# Altium PCB S52多功能板.PcbDoc (part 5 of 5)
Units mm, origin at the board's own origin, x right, y up, seen from the top; angles counter-clockwise.
Board outline 152.4 x 101.6 mm, 2 copper layers (Top Layer, Bottom Layer); 136 components, 143 nets, 561 pads, 46 vias.
Unrouted connection lines stored in the file: 1.
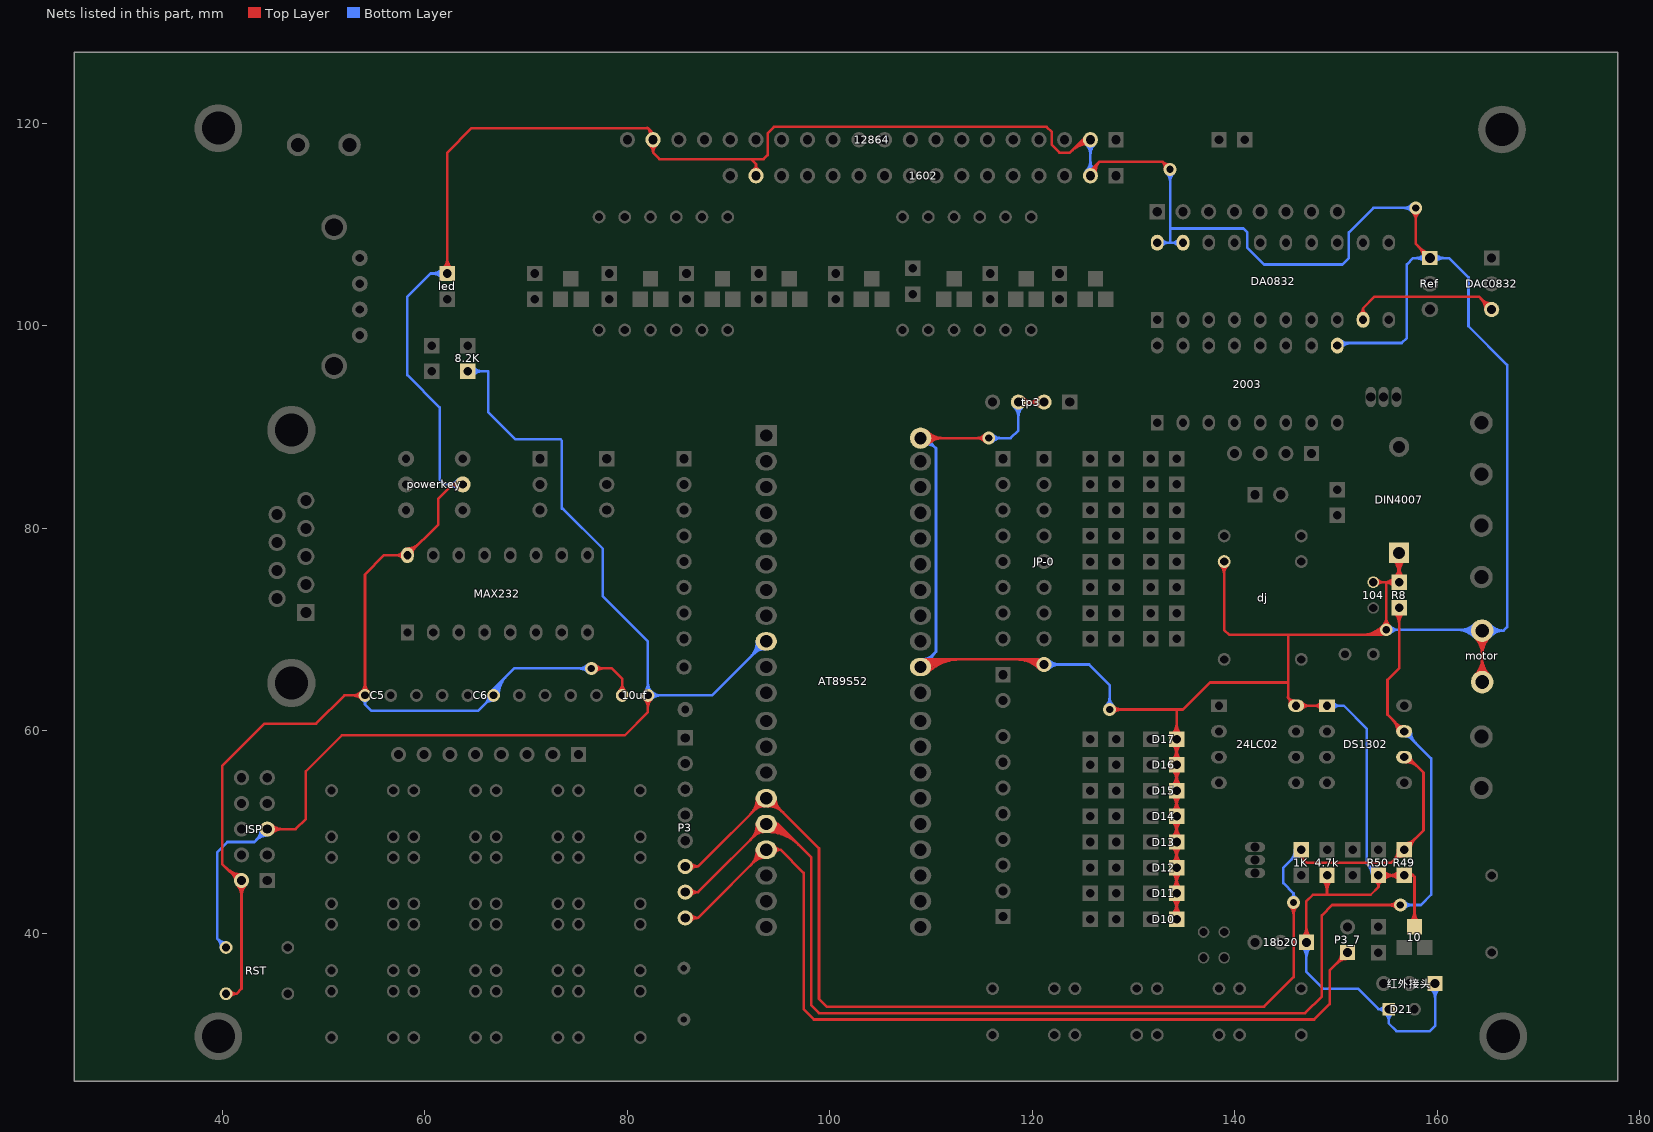
[diagram p5: the nets of this part, all layers, seen from the top]

## Via types
v1: diameter 1.27, hole 0.711, Top Layer to Bottom Layer, 46 vias

## Nets (pads, with @x,y where several pads share a name; then routed paths per layer and width w, separated by ;. In a path a pad name is that pad's centre, name@x,y a point inside that pad or via, vN(x,y) a via of type N, cw(c..) or ccw(c..) an arc to the next point about the centre after c; other vN are vias at no path point) (continued)
P35: 1K.1 AT89S52.15 DS1302.6 P3.6 R49.1 | length 148.3
  Top Layer w0.254: P3.6@85.725,46.609 86.995,46.609 ; P3.6@86.017,46.383 cw(c86.477,46.027) 86.477,46.609 cw(c86.477,47.191) P3.6@86.017,46.835 ; P3.6@86.218,46.228 cw(c86.995,45.626) 86.995,46.609 ; P3.6@86.218,46.99 ccw(c86.995,47.592) 86.995,46.609 ; 92.146,51.76 ccw(c90.566,53.34) AT89S52.15@92.801,53.34 ; 92.508,52.122 cw(c93.576,51.055) AT89S52.15@93.576,52.565 ; 92.58,52.194 ccw(c91.434,53.34) AT89S52.15@93.055,53.34 ; 92.942,52.556 cw(c93.576,51.922) AT89S52.15@93.576,52.819 ; 93.013,52.627 ccw(c92.301,53.34) AT89S52.15@93.309,53.34 ; AT89S52.15@93.876,52.565 cw(c93.876,50.442) 95.377,51.943 ; AT89S52.15@93.876,52.819 cw(c93.876,51.309) 94.944,52.376 ; AT89S52.15@94.397,53.34 ccw(c95.405,53.34) 94.693,52.627 ; AT89S52.15@94.651,53.34 ccw(c96.272,53.34) 95.126,52.194 ; v1@145.437,42.694 cw(c144.57,41.827) 145.796,41.827 cw(c147.022,41.827) v1@146.155,42.694 ; v1(145.796,43.053) 145.796,35.687 142.875,32.766 99.695,32.766 98.933,33.528 98.933,48.387 93.98,53.34 AT89S52.15@93.726,53.34 86.995,46.609 ; 1K.1@146.558,48.26 146.558,47.498 147.066,46.99 155.448,46.99 158.623,50.165 158.623,55.88 157.1,57.403 DS1302.6@156.714,57.403 ; R49.1@156.083,48.26 cw(c154.55,48.26) 155.634,47.176 cw(c156.718,46.092) R49.1@156.718,47.625 ; R49.1@156.337,48.26 cw(c155.417,48.26) 156.068,47.61 cw(c156.718,46.959) R49.1@156.718,47.879 ; R49.1@156.718,48.641 ccw(c156.718,49.561) 157.368,48.91 ccw(c158.019,48.26) R49.1@157.099,48.26 ; R49.1@156.718,48.895 ccw(c156.718,50.428) 157.802,49.344 ccw(c158.886,48.26) R49.1@157.353,48.26 ; DS1302.6@156.892,56.92 cw(c156.892,55.253) 158.071,56.432 ; DS1302.6@156.892,57.174 cw(c156.892,56.12) 157.637,56.866 ; DS1302.6@157.375,57.403 ccw(c158.037,57.403) 157.569,56.934
  Bottom Layer w0.254: v1@145.538,43.491 ccw(c145.272,43.942) 145.796,43.942 ; v1(145.796,43.053) 145.796,43.942 ; 1K.1@145.923,48.26 cw(c144.39,48.26) 145.474,47.176 cw(c146.558,46.092) 1K.1@146.558,47.625 ; v1@146.054,43.491 cw(c146.32,43.942) 145.796,43.942 ; 1K.1@146.177,48.26 cw(c145.257,48.26) 145.908,47.61 cw(c146.558,46.959) 1K.1@146.558,47.879 ; 1K.1@146.558,48.26 144.78,46.482 144.78,44.958 145.796,43.942
P36: AT89S52.16 DS1302.7 P3.7 R8.1 | length 166.9
  Top Layer w0.254: P3.7@85.725,44.069 86.995,44.069 ; P3.7@86.017,43.843 cw(c86.477,43.487) 86.477,44.069 cw(c86.477,44.651) P3.7@86.017,44.295 ; P3.7@86.218,43.688 cw(c86.995,43.086) 86.995,44.069 ; P3.7@86.218,44.45 ccw(c86.995,45.052) 86.995,44.069 ; 92.146,49.22 ccw(c90.566,50.8) AT89S52.16@92.801,50.8 ; 92.508,49.582 cw(c93.576,48.515) AT89S52.16@93.576,50.025 ; 92.58,49.654 ccw(c91.434,50.8) AT89S52.16@93.055,50.8 ; 92.942,50.016 cw(c93.576,49.382) AT89S52.16@93.576,50.279 ; 93.013,50.087 ccw(c92.301,50.8) AT89S52.16@93.309,50.8 ; AT89S52.16@93.876,50.025 cw(c93.876,45.755) 96.895,48.774 ; AT89S52.16@93.876,50.279 cw(c93.876,46.623) 96.461,49.208 ; AT89S52.16@93.876,50.533 cw(c93.876,47.49) 96.028,49.641 ; AT89S52.16@93.876,50.787 cw(c93.876,48.357) 95.594,50.075 ; AT89S52.16@93.876,51.041 cw(c93.876,49.224) 95.16,50.509 ; AT89S52.16@94.628,50.612 cw(c94.869,50.552) 94.869,50.8 ; AT89S52.16@94.628,50.988 ccw(c94.869,51.048) 94.869,50.8 ; 155.587,61.07 cw(c154.459,59.943) DS1302.7@156.054,59.943 ; R8.1@155.761,71.687 cw(c154.677,70.603) 156.21,70.603 cw(c157.743,70.603) R8.1@156.659,71.687 ; R8.1@155.941,71.867 cw(c155.29,71.216) 156.21,71.216 cw(c157.13,71.216) R8.1@156.479,71.867 ; v1@155.978,42.44 ccw(c155.111,41.573) 155.111,42.799 ccw(c155.111,44.025) v1@155.978,43.158 ; 156.016,60.641 ccw(c156.536,61.161) DS1302.7@156.536,60.426 ; 156.02,60.637 cw(c155.327,59.943) DS1302.7@156.308,59.943 ; DS1302.7@156.206,59.94 DS1302.7@156.206,59.943 ; R8.1@156.21,72.136 156.21,66.167 155.067,65.024 155.067,61.59 DS1302.7@156.714,59.943 ; v1(156.337,42.799) 149.606,42.799 148.59,41.783 148.59,33.782 146.939,32.131 98.933,32.131 98.171,32.893 98.171,47.498 94.869,50.8 ; 86.995,44.069 AT89S52.16@93.726,50.8 94.869,50.8
  Bottom Layer w0.254: v1(156.337,42.799) 158.369,42.799 159.385,43.815 159.385,57.272 DS1302.7@156.714,59.943 ; v1@156.696,42.44 cw(c157.563,41.573) 157.563,42.799 cw(c157.563,44.025) v1@156.696,43.158 ; DS1302.7@156.892,59.46 cw(c156.892,58.725) 157.412,59.245 ; DS1302.7@157.121,59.943 ccw(c158.102,59.943) 157.408,59.249 ; DS1302.7@157.375,59.943 ccw(c158.969,59.943) 157.842,58.816
P37: AT89S52.17 P3.8 P3_7.1 | length 101.4
  Top Layer w0.254: P3.8@85.725,41.529 86.995,41.529 ; P3.8@86.017,41.303 cw(c86.477,40.947) 86.477,41.529 cw(c86.477,42.111) P3.8@86.017,41.755 ; P3.8@86.218,41.148 cw(c86.995,40.546) 86.995,41.529 ; P3.8@86.218,41.91 ccw(c86.995,42.512) 86.995,41.529 ; 92.146,46.68 ccw(c90.566,48.26) AT89S52.17@92.801,48.26 ; 92.508,47.042 cw(c93.576,45.975) AT89S52.17@93.576,47.485 ; 92.58,47.114 ccw(c91.434,48.26) AT89S52.17@93.055,48.26 ; 92.942,47.476 cw(c93.576,46.842) AT89S52.17@93.576,47.739 ; 93.013,47.547 ccw(c92.301,48.26) AT89S52.17@93.309,48.26 ; AT89S52.17@94.571,47.917 cw(c95.123,47.645) 95.123,48.26 ; AT89S52.17@94.571,48.603 ccw(c95.123,48.875) 95.123,48.26 ; P3_7.1@150.507,38.1 cw(c149.003,38.1) 150.066,37.036 cw(c151.13,35.973) P3_7.1@151.13,37.477 ; P3_7.1@150.761,38.1 cw(c149.87,38.1) 150.5,37.47 cw(c151.13,36.84) P3_7.1@151.13,37.731 ; P3_7.1@151.13,38.1 149.352,36.322 149.352,33.02 147.828,31.496 98.425,31.496 97.409,32.512 97.409,45.974 95.123,48.26 ; 86.995,41.529 AT89S52.17@93.726,48.26 95.123,48.26
RESET: 8.2K.1 10uf.2 AT89S52.9 ISP.5 RST.1 | length 144.2
  Top Layer w0.254: ISP.5@44.45,50.292 47.244,50.292 48.26,51.308 48.26,56.007 51.816,59.563 79.756,59.563 82.042,61.849 10uf.2@82.042,63.5 ; ISP.5@44.711,50.031 cw(c45.341,49.401) 45.341,50.292 cw(c45.341,51.183) ISP.5@44.711,50.553 ; ISP.5@44.891,49.851 cw(c45.954,48.788) 45.954,50.292 cw(c45.954,51.796) ISP.5@44.891,50.733 ; 10uf.2@81.683,63.141 cw(c80.816,62.274) 82.042,62.274 cw(c83.268,62.274) 10uf.2@82.401,63.141
  Bottom Layer w0.254: RST.1@39.878,38.608 ccw(c38.652,38.608) 39.519,39.475 ccw(c40.386,40.342) RST.1@40.386,39.116 ; RST.1@40.386,38.608 39.497,39.497 39.497,48.006 40.513,49.022 43.18,49.022 ISP.5@44.45,50.292 ; ISP.5@43.827,50.292 cw(c42.323,50.292) 43.386,49.228 cw(c44.45,48.165) ISP.5@44.45,49.669 ; ISP.5@44.081,50.292 cw(c43.19,50.292) 43.82,49.662 cw(c44.45,49.032) ISP.5@44.45,49.923 ; 8.2K.1@64.262,95.504 66.294,95.504 66.294,91.44 68.961,88.773 73.406,88.773 73.533,88.646 73.533,81.915 73.66,81.915 77.597,77.978 77.597,73.279 82.042,68.834 ; 8.2K.1@64.531,95.235 cw(c65.182,94.584) 65.182,95.504 cw(c65.182,96.424) 8.2K.1@64.531,95.773 ; 8.2K.1@64.711,95.055 cw(c65.795,93.971) 65.795,95.504 cw(c65.795,97.037) 8.2K.1@64.711,95.953 ; 10uf.2@81.683,63.859 ccw(c80.816,64.726) 82.042,64.726 ccw(c83.268,64.726) 82.401,63.859 ccw(c83.268,64.726) 83.268,63.5 ccw(c83.268,62.274) 10uf.2@82.401,63.141 ; 82.042,68.707 10uf.2@82.042,63.5 88.389,63.5 AT89S52.9@93.722,68.833 ; 92.142,67.253 ccw(c90.563,68.833) AT89S52.9@92.797,68.833 ; 92.505,67.615 cw(c93.572,66.548) AT89S52.9@93.572,68.058 ; 92.576,67.687 ccw(c91.43,68.833) AT89S52.9@93.051,68.833 ; 92.938,68.049 cw(c93.572,67.415) AT89S52.9@93.572,68.312 ; 93.01,68.12 ccw(c92.297,68.833) AT89S52.9@93.305,68.833
RFB: DA0832.9 DAC0832.3 | length 20
  Top Layer w0.254: DA0832.9@152.36,101.149 ccw(c151.938,101.727) 152.654,101.727 ; DA0832.9@152.654,100.584 152.654,101.727 ; DA0832.9@152.948,101.149 cw(c153.37,101.727) 152.654,101.727 ; DAC0832.3@164.731,101.6 ccw(c163.227,101.6) 164.29,102.664 ccw(c165.354,103.727) DAC0832.3@165.354,102.223 ; DAC0832.3@164.985,101.6 ccw(c164.094,101.6) 164.724,102.23 ccw(c165.354,102.86) DAC0832.3@165.354,101.969 ; DAC0832.3@165.354,101.6 164.084,102.87 153.797,102.87 152.654,101.727
V0: 
VCC: 4.7k.1 10.C 10uf.1 18b20.1 24LC02.8 104.1 1602.2 1602.15 2003.9 12864.2 12864.19 AT89S52.31 AT89S52.40 C5.1 C6.2 D10.1 D11.1 D12.1 D13.1 D14.1 D15.1 D16.1 D17.1 D21.1 DA0832.19 DA0832.20 DIN4007.2 dj.5 DS1302.1 ISP.2 JP-0.9 led.1 MAX232.16 motor.1 motor.2 powerkey.2 R8.2 R49.2 R50.2 Ref.1 RST.2 tp3.2 tp3.3 红外接头.1 | length 1020.1
  Top Layer w0.254: RST.2@40.386,34.036 41.402,34.036 ; 40.413,46.455 ccw(c41.91,47.952) ISP.2@41.91,45.835 ; RST.2@40.792,33.731 cw(c41.402,33.274) 41.402,34.036 ; RST.2@40.792,34.341 ccw(c41.402,34.798) 41.402,34.036 ; 40.846,46.022 ccw(c41.91,47.085) ISP.2@41.91,45.581 ; 41.026,45.842 cw(c40.396,45.212) ISP.2@41.287,45.212 ; ISP.2@41.469,44.771 cw(c40.406,43.708) 41.91,43.708 cw(c43.414,43.708) ISP.2@42.351,44.771 ; ISP.2@41.649,44.951 cw(c41.019,44.321) 41.91,44.321 cw(c42.801,44.321) ISP.2@42.171,44.951 ; C5.1@53.743,63.141 ccw(c52.876,62.274) 52.876,63.5 ccw(c52.876,64.726) 53.743,63.859 ccw(c52.876,64.726) 54.102,64.726 ccw(c55.328,64.726) C5.1@54.461,63.859 ; MAX232.16@57.942,76.987 ccw(c57.092,76.137) 57.092,77.339 ccw(c57.092,78.541) MAX232.16@57.942,77.691 ; MAX232.16@58.294,77.746 ccw(c58.294,78.715) 58.98,78.03 ; MAX232.16@58.294,78 ccw(c58.294,79.582) 59.413,78.463 ; MAX232.16@58.792,77.502 cw(c59.614,77.502) 59.033,78.083 ; led.1@61.781,105.605 ccw(c60.697,106.689) 62.23,106.689 ccw(c63.763,106.689) led.1@62.679,105.605 ; led.1@61.961,105.425 ccw(c61.31,106.076) 62.23,106.076 ccw(c63.15,106.076) led.1@62.499,105.425 ; led.1@62.23,105.156 62.23,117.094 64.643,119.507 82.042,119.507 82.55,118.999 82.55,117.094 ; powerkey.2@63.15,84.06 ccw(c62.738,83.877) 62.738,84.328 ; powerkey.2@63.15,84.596 cw(c62.738,84.779) 62.738,84.328 ; powerkey.2@63.754,84.328 62.738,84.328 ; v1(76.454,66.167) 78.486,66.167 79.502,65.151 10uf.1@79.502,63.5 ; v1@76.813,65.808 cw(c77.68,64.941) 77.68,66.167 cw(c77.68,67.393) v1@76.813,66.526 ; 10uf.1@79.143,63.859 ccw(c78.276,64.726) 79.502,64.726 ccw(c80.728,64.726) 10uf.1@79.861,63.859 ; 81.995,119.554 cw(c81.31,118.868) 12864.19@82.208,118.503 ; 12864.19@82.169,117.871 cw(c81.567,117.094) 82.55,117.094 ; 82.266,119.283 cw(c81.695,118.711) 12864.19@82.443,118.407 ; 12864.19@82.324,118.072 cw(c81.968,117.612) 82.55,117.612 cw(c83.132,117.612) 12864.19@82.776,118.072 ; 12864.19@82.931,117.871 ccw(c83.533,117.094) 82.55,117.094 ; 92.202,116.459 92.71,115.951 ; 1602.15@92.372,115.332 ccw(c91.973,115.951) 92.71,115.951 ; 1602.15@92.71,114.808 92.71,115.951 ; 1602.15@93.048,115.332 cw(c93.447,115.951) 92.71,115.951 ; AT89S52.31@108.762,66.643 cw(c109.76,65.645) 109.76,67.056 ; AT89S52.31@108.942,66.463 cw(c110.373,65.032) 110.373,67.056 ; AT89S52.31@108.962,66.293 108.962,66.544 109.474,67.056 120.65,67.056 JP-0.9@121.158,66.548 ; AT89S52.40@108.966,88.9 v1(115.697,88.9) ; AT89S52.31@109.122,66.284 cw(c110.987,64.419) 110.987,67.056 ; AT89S52.31@109.301,66.104 cw(c111.6,63.805) 111.6,67.056 ; AT89S52.40@109.441,88.425 cw(c110.587,87.279) 110.587,88.9 cw(c110.587,90.521) AT89S52.40@109.441,89.375 ; AT89S52.31@109.481,65.924 cw(c112.213,63.192) 112.213,67.056 ; AT89S52.40@109.62,88.246 cw(c111.2,86.666) 111.2,88.9 cw(c111.2,91.134) AT89S52.40@109.62,89.554 ; AT89S52.31@109.66,65.745 cw(c112.826,62.579) 112.826,67.056 ; v1@115.338,88.541 ccw(c114.471,87.674) 114.471,88.9 ccw(c114.471,90.126) v1@115.338,89.259 ; 118.428,67.056 cw(c118.428,63.818) JP-0.9@120.717,66.107 ; tp3.3@118.618,92.456 tp3.2@121.158,92.456 ; tp3.3@118.879,92.195 cw(c119.509,91.565) 119.509,92.456 cw(c119.509,93.347) tp3.3@118.879,92.717 ; 119.041,67.056 cw(c119.041,64.431) JP-0.9@120.897,66.287 ; tp3.3@119.059,92.015 cw(c120.122,90.952) 120.122,92.456 cw(c120.122,93.96) tp3.3@119.059,92.897 ; 119.654,67.056 cw(c119.654,65.044) JP-0.9@121.077,66.467 ; 120.267,67.056 cw(c120.267,65.657) JP-0.9@121.256,66.646 ; tp3.2@120.717,92.015 ccw(c119.654,90.952) 119.654,92.456 ccw(c119.654,93.96) tp3.2@120.717,92.897 ; tp3.2@120.897,92.195 ccw(c120.267,91.565) 120.267,92.456 ccw(c120.267,93.347) tp3.2@120.897,92.717 ; 123.799,117.195 cw(c125.73,115.265) 12864.2@125.73,117.995 ; 124.233,117.629 cw(c125.73,116.132) 12864.2@125.73,118.249 ; 124.666,118.062 cw(c125.73,116.999) 12864.2@125.73,118.503 ; 12864.2@125.119,118.24 ccw(c124.968,118.21) 124.968,118.364 ; 12864.2@125.119,118.488 cw(c124.968,118.518) 124.968,118.364 ; 1602.2@125.73,114.808 125.73,115.316 126.619,116.205 ; 12864.2@125.73,118.364 124.968,118.364 ; 1602.2@125.84,114.843 cw(c126.568,115.073) 126.028,115.614 ; 1602.2@126.082,114.919 cw(c127.017,115.216) 126.323,115.909 ; 1602.2@126.324,114.996 cw(c127.466,115.358) 126.619,116.205 ; v1(127.635,62.103) 134.874,62.103 137.541,64.77 145.288,64.77 ; v1@127.994,61.744 cw(c128.861,60.877) 128.861,62.103 cw(c128.861,63.329) v1@127.994,62.462 ; v1@133.098,115.492 ccw(c132.213,115.576) 132.842,116.205 ; v1@133.555,115.949 cw(c133.471,116.834) 132.842,116.205 ; v1(133.604,115.443) 132.842,116.205 ; D15.1@133.79,54.551 ccw(c132.706,55.635) 134.239,55.635 ccw(c135.772,55.635) D15.1@134.688,54.551 ; D16.1@133.79,56.193 cw(c132.706,55.109) 134.239,55.109 cw(c135.772,55.109) D16.1@134.688,56.193 ; D16.1@133.79,57.091 ccw(c132.706,58.175) 134.239,58.175 ccw(c135.772,58.175) D16.1@134.688,57.091 ; D17.1@133.79,58.733 cw(c132.706,57.649) 134.239,57.649 cw(c135.772,57.649) D17.1@134.688,58.733 ; D17.1@133.79,59.631 ccw(c132.706,60.715) 134.239,60.715 ccw(c135.772,60.715) D17.1@134.688,59.631 ; D15.1@133.97,54.371 ccw(c133.319,55.022) 134.239,55.022 ccw(c135.159,55.022) D15.1@134.508,54.371 ; D16.1@133.97,56.373 cw(c133.319,55.722) 134.239,55.722 cw(c135.159,55.722) D16.1@134.508,56.373 ; D16.1@133.97,56.911 ccw(c133.319,57.562) 134.239,57.562 ccw(c135.159,57.562) D16.1@134.508,56.911 ; D17.1@133.97,58.913 cw(c133.319,58.262) 134.239,58.262 cw(c135.159,58.262) D17.1@134.508,58.913 ; D17.1@133.97,59.451 ccw(c133.319,60.102) 134.239,60.102 ccw(c135.159,60.102) D17.1@134.508,59.451 ; D11.1@134.239,43.942 D10.1@134.239,41.402 ; D12.1@134.239,46.482 D10.1@134.239,41.402 ; D13.1@134.239,49.022 D10.1@134.239,41.402 ; D14.1@134.239,51.562 D10.1@134.239,41.402 ; D15.1@134.239,54.102 D10.1@134.239,41.402 ; 134.239,62.103 D16.1@134.239,56.642 D10.1@134.239,41.402 ; dj.5@138.579,76.349 cw(c137.712,75.482) 138.938,75.482 cw(c140.164,75.482) dj.5@139.297,76.349 ; dj.5@138.938,76.708 138.938,69.977 139.446,69.469 154.432,69.469 ; 145.199,63.33 cw(c144.657,62.788) 24LC02.8@145.4,62.601 ; 145.288,69.469 145.288,63.241 24LC02.8@146.046,62.483 DS1302.1@149.094,62.483 ; 145.348,63.181 ccw(c145.868,63.701) 24LC02.8@145.868,62.966 ; 145.516,63.014 cw(c145.163,62.661) 24LC02.8@145.647,62.539 ; 24LC02.8@146.565,62.142 cw(c147.389,61.318) 147.389,62.483 cw(c147.389,63.648) 24LC02.8@146.565,62.824 ; 18b20.1@146.625,39.557 ccw(c145.562,40.62) 147.066,40.62 ccw(c148.57,40.62) 18b20.1@147.507,39.557 ; 18b20.1@146.805,39.377 ccw(c146.175,40.007) 147.066,40.007 ccw(c147.957,40.007) 18b20.1@147.327,39.377 ; 18b20.1@147.193,39.116 18b20.1@147.066,39.116 147.066,43.18 147.701,43.815 153.416,43.815 154.178,44.577 ; DS1302.1@148.575,62.142 ccw(c147.751,61.318) 147.751,62.483 ccw(c147.751,63.648) DS1302.1@148.575,62.824 ; 4.7k.1@148.649,45.271 cw(c147.565,44.187) 149.098,44.187 cw(c150.631,44.187) 4.7k.1@149.547,45.271 ; 4.7k.1@148.829,45.451 cw(c148.178,44.8) 149.098,44.8 cw(c150.018,44.8) 4.7k.1@149.367,45.451 ; 4.7k.1@149.098,45.72 149.098,43.942 149.225,43.815 ; 152.487,69.469 ccw(c152.487,72.43) 154.581,70.336 ccw(c153.714,71.203) 154.94,71.203 ccw(c156.166,71.203) v1@155.299,70.336 ; 153.1,69.469 ccw(c153.1,71.817) v1@154.76,70.157 ; 104.1@153.67,74.676 R8.2@156.21,74.676 DIN4007.2@156.21,77.574 ; 153.714,69.469 ccw(c153.714,71.203) v1(154.94,69.977) ; R50.2@153.843,45.181 cw(c153.467,44.577) 154.178,44.577 ; 104.1@153.984,74.362 cw(c154.743,73.603) 154.743,74.676 cw(c154.743,75.749) 104.1@153.984,74.99 ; 154.327,69.469 ccw(c154.327,70.59) v1@155.12,69.797 ; R50.2@154.447,45.451 cw(c155.098,44.8) 155.098,45.72 cw(c155.098,46.64) R50.2@154.447,45.989 ; v1@154.482,69.758 cw(c154.252,69.649) 154.432,69.469 ; R50.2@154.513,45.181 ccw(c154.889,44.577) 154.178,44.577 ; R50.2@154.627,45.271 cw(c155.711,44.187) 155.711,45.72 cw(c155.711,47.253) R50.2@154.627,46.169 ; v1@154.721,69.519 ccw(c154.612,69.289) 154.432,69.469 ; 154.94,74.676 v1(154.94,69.977) ; DIN4007.2@155.593,76.957 cw(c154.102,75.466) 156.21,75.466 cw(c158.318,75.466) DIN4007.2@156.827,76.957 ; R8.2@155.761,74.227 ccw(c154.677,73.143) 154.677,74.676 ccw(c154.677,76.209) 155.761,75.125 ccw(c154.677,76.209) 156.21,76.209 ccw(c157.743,76.209) R8.2@156.659,75.125 ; DIN4007.2@155.772,77.136 cw(c154.716,76.08) 156.21,76.08 cw(c157.704,76.08) DIN4007.2@156.648,77.136 ; R8.2@155.941,74.407 ccw(c155.29,73.756) 155.29,74.676 ccw(c155.29,75.596) 155.941,74.945 ccw(c155.29,75.596) 156.21,75.596 ccw(c157.13,75.596) R8.2@156.479,74.945 ; R49.2@156.269,45.271 ccw(c155.185,44.187) 155.185,45.72 ccw(c155.185,47.253) R49.2@156.269,46.169 ; R49.2@156.449,45.451 ccw(c155.798,44.8) 155.798,45.72 ccw(c155.798,46.64) R49.2@156.449,45.989 ; R49.2@156.64,45.821 cw(c157.069,45.265) 157.566,45.761 ; R49.2@156.796,45.619 cw(c157.247,45.034) 157.77,45.557 ; 10.C@157.285,41.089 ccw(c156.201,42.173) 157.734,42.173 ccw(c159.267,42.173) 10.C@158.183,41.089 ; R49.2@157.319,45.514 cw(c157.607,45.415) 157.607,45.72 ; R49.2@157.319,45.926 ccw(c157.607,46.025) 157.607,45.72 ; 10.C@157.465,40.909 ccw(c156.814,41.56) 157.734,41.56 ccw(c158.654,41.56) 10.C@158.003,40.909 ; v1@157.502,111.274 cw(c156.635,110.407) 157.861,110.407 cw(c159.087,110.407) v1@158.22,111.274 ; 10.C@157.734,40.64 157.734,45.593 157.607,45.72 ; v1(157.861,111.633) 157.861,108.077 Ref.1@159.258,106.68 ; 158.174,107.764 cw(c157.09,106.68) Ref.1@158.623,106.68 ; 158.327,107.611 ccw(c159.195,108.478) Ref.1@159.195,107.251 ; Ref.1@158.608,107.33 cw(c157.957,106.68) Ref.1@158.877,106.68 ; motor.1@163.719,65.507 ccw(c162.037,67.189) 164.416,67.189 ; motor.2@163.719,69.194 cw(c162.037,67.511) 164.416,67.511 ; motor.1@163.899,65.327 ccw(c162.65,66.576) 164.416,66.576 ; motor.2@163.899,69.373 cw(c162.65,68.124) 164.416,68.124 ; motor.1@164.079,65.147 ccw(c163.264,65.962) 164.416,65.962 ; motor.2@164.079,69.553 cw(c163.264,68.738) 164.416,68.738 ; motor.1@164.416,64.81 motor.2@164.416,69.89 ; 164.416,65.961 ccw(c165.567,65.961) motor.1@164.753,65.147 ; 164.416,66.574 ccw(c166.18,66.574) motor.1@164.933,65.327 ; 164.416,67.187 ccw(c166.793,67.187) motor.1@165.112,65.507 ; 164.416,67.513 cw(c166.793,67.513) motor.2@165.112,69.194 ; 164.416,68.126 cw(c166.18,68.126) motor.2@164.933,69.373 ; 164.416,68.739 cw(c165.567,68.739) motor.2@164.753,69.553 ; 41.402,34.036 41.91,34.544 ISP.2@41.91,45.212 41.656,45.212 40.005,46.863 40.005,56.515 44.196,60.706 49.276,60.706 52.07,63.5 C5.1@54.102,63.5 54.102,75.438 56.003,77.339 MAX232.16@58.294,77.339 58.294,77.344 61.341,80.391 61.341,82.931 62.738,84.328 ; 82.55,117.094 83.185,116.459 93.472,116.459 93.853,116.84 93.853,118.999 94.488,119.634 121.412,119.634 121.92,119.126 121.92,117.856 122.682,117.094 123.698,117.094 124.968,118.364 ; 126.619,116.205 132.842,116.205 ; D10.1@133.79,41.851 ccw(c132.706,42.935) 134.239,42.935 ; D10.1@133.79,41.851 ccw(c132.706,42.935) 134.239,42.935 ; D10.1@133.79,41.851 ccw(c132.706,42.935) 134.239,42.935 ; D10.1@133.79,41.851 ccw(c132.706,42.935) 134.239,42.935 ; D10.1@133.79,41.851 ccw(c132.706,42.935) 134.239,42.935 ; D10.1@133.79,41.851 ccw(c132.706,42.935) 134.239,42.935 ; D11.1@133.79,43.493 cw(c132.706,42.409) 134.239,42.409 ; D11.1@133.79,43.493 cw(c132.706,42.409) 134.239,42.409 ; D11.1@133.79,43.493 cw(c132.706,42.409) 134.239,42.409 ; D11.1@133.79,43.493 cw(c132.706,42.409) 134.239,42.409 ; D11.1@133.79,43.493 cw(c132.706,42.409) 134.239,42.409 ; D11.1@133.79,43.493 cw(c132.706,42.409) 134.239,42.409 ; D11.1@133.79,44.391 ccw(c132.706,45.475) 134.239,45.475 ; D11.1@133.79,44.391 ccw(c132.706,45.475) 134.239,45.475 ; D11.1@133.79,44.391 ccw(c132.706,45.475) 134.239,45.475 ; D11.1@133.79,44.391 ccw(c132.706,45.475) 134.239,45.475 ; D11.1@133.79,44.391 ccw(c132.706,45.475) 134.239,45.475 ; D12.1@133.79,46.033 cw(c132.706,44.949) 134.239,44.949 ; D12.1@133.79,46.033 cw(c132.706,44.949) 134.239,44.949 ; D12.1@133.79,46.033 cw(c132.706,44.949) 134.239,44.949 ; D12.1@133.79,46.033 cw(c132.706,44.949) 134.239,44.949 ; D12.1@133.79,46.033 cw(c132.706,44.949) 134.239,44.949 ; D12.1@133.79,46.931 ccw(c132.706,48.015) 134.239,48.015 ; D12.1@133.79,46.931 ccw(c132.706,48.015) 134.239,48.015 ; D12.1@133.79,46.931 ccw(c132.706,48.015) 134.239,48.015 ; D12.1@133.79,46.931 ccw(c132.706,48.015) 134.239,48.015 ; D13.1@133.79,48.573 cw(c132.706,47.489) 134.239,47.489 ; D13.1@133.79,48.573 cw(c132.706,47.489) 134.239,47.489 ; D13.1@133.79,48.573 cw(c132.706,47.489) 134.239,47.489 ; D13.1@133.79,48.573 cw(c132.706,47.489) 134.239,47.489 ; D13.1@133.79,49.471 ccw(c132.706,50.555) 134.239,50.555 ; D13.1@133.79,49.471 ccw(c132.706,50.555) 134.239,50.555 ; D13.1@133.79,49.471 ccw(c132.706,50.555) 134.239,50.555 ; D14.1@133.79,51.113 cw(c132.706,50.029) 134.239,50.029 ; D14.1@133.79,51.113 cw(c132.706,50.029) 134.239,50.029 ; D14.1@133.79,51.113 cw(c132.706,50.029) 134.239,50.029 ; D10.1@133.97,41.671 ccw(c133.319,42.322) 134.239,42.322 ; D10.1@133.97,41.671 ccw(c133.319,42.322) 134.239,42.322 ; D10.1@133.97,41.671 ccw(c133.319,42.322) 134.239,42.322 ; D10.1@133.97,41.671 ccw(c133.319,42.322) 134.239,42.322 ; D10.1@133.97,41.671 ccw(c133.319,42.322) 134.239,42.322 ; D10.1@133.97,41.671 ccw(c133.319,42.322) 134.239,42.322 ; D11.1@133.97,43.673 cw(c133.319,43.022) 134.239,43.022 ; D11.1@133.97,43.673 cw(c133.319,43.022) 134.239,43.022 ; D11.1@133.97,43.673 cw(c133.319,43.022) 134.239,43.022 ; D11.1@133.97,43.673 cw(c133.319,43.022) 134.239,43.022 ; D11.1@133.97,43.673 cw(c133.319,43.022) 134.239,43.022 ; D11.1@133.97,43.673 cw(c133.319,43.022) 134.239,43.022 ; D11.1@133.97,44.211 ccw(c133.319,44.862) 134.239,44.862 ; D11.1@133.97,44.211 ccw(c133.319,44.862) 134.239,44.862 ; D11.1@133.97,44.211 ccw(c133.319,44.862) 134.239,44.862 ; D11.1@133.97,44.211 ccw(c133.319,44.862) 134.239,44.862 ; D11.1@133.97,44.211 ccw(c133.319,44.862) 134.239,44.862 ; D12.1@133.97,46.213 cw(c133.319,45.562) 134.239,45.562 ; D12.1@133.97,46.213 cw(c133.319,45.562) 134.239,45.562 ; D12.1@133.97,46.213 cw(c133.319,45.562) 134.239,45.562 ; D12.1@133.97,46.213 cw(c133.319,45.562) 134.239,45.562 ; D12.1@133.97,46.213 cw(c133.319,45.562) 134.239,45.562 ; D12.1@133.97,46.751 ccw(c133.319,47.402) 134.239,47.402 ; D12.1@133.97,46.751 ccw(c133.319,47.402) 134.239,47.402 ; D12.1@133.97,46.751 ccw(c133.319,47.402) 134.239,47.402 ; D12.1@133.97,46.751 ccw(c133.319,47.402) 134.239,47.402 ; D13.1@133.97,48.753 cw(c133.319,48.102) 134.239,48.102 ; D13.1@133.97,48.753 cw(c133.319,48.102) 134.239,48.102 ; D13.1@133.97,48.753 cw(c133.319,48.102) 134.239,48.102 ; D13.1@133.97,48.753 cw(c133.319,48.102) 134.239,48.102 ; D13.1@133.97,49.291 ccw(c133.319,49.942) 134.239,49.942 ; D13.1@133.97,49.291 ccw(c133.319,49.942) 134.239,49.942 ; D13.1@133.97,49.291 ccw(c133.319,49.942) 134.239,49.942 ; D14.1@133.97,51.293 cw(c133.319,50.642) 134.239,50.642 ; D14.1@133.97,51.293 cw(c133.319,50.642) 134.239,50.642 ; D14.1@133.97,51.293 cw(c133.319,50.642) 134.239,50.642 ; 134.239,42.322 ccw(c135.159,42.322) D10.1@134.508,41.671 ; 134.239,42.322 ccw(c135.159,42.322) D10.1@134.508,41.671 ; 134.239,42.322 ccw(c135.159,42.322) D10.1@134.508,41.671 ; 134.239,42.322 ccw(c135.159,42.322) D10.1@134.508,41.671 ; 134.239,42.322 ccw(c135.159,42.322) D10.1@134.508,41.671 ; 134.239,42.322 ccw(c135.159,42.322) D10.1@134.508,41.671 ; 134.239,42.409 cw(c135.772,42.409) D11.1@134.688,43.493 ; 134.239,42.409 cw(c135.772,42.409) D11.1@134.688,43.493 ; 134.239,42.409 cw(c135.772,42.409) D11.1@134.688,43.493 ; 134.239,42.409 cw(c135.772,42.409) D11.1@134.688,43.493 ; 134.239,42.409 cw(c135.772,42.409) D11.1@134.688,43.493 ; 134.239,42.409 cw(c135.772,42.409) D11.1@134.688,43.493 ; 134.239,42.935 ccw(c135.772,42.935) D10.1@134.688,41.851 ; 134.239,42.935 ccw(c135.772,42.935) D10.1@134.688,41.851 ; 134.239,42.935 ccw(c135.772,42.935) D10.1@134.688,41.851 ; 134.239,42.935 ccw(c135.772,42.935) D10.1@134.688,41.851 ; 134.239,42.935 ccw(c135.772,42.935) D10.1@134.688,41.851 ; 134.239,42.935 ccw(c135.772,42.935) D10.1@134.688,41.851 ; 134.239,43.022 cw(c135.159,43.022) D11.1@134.508,43.673 ; 134.239,43.022 cw(c135.159,43.022) D11.1@134.508,43.673 ; 134.239,43.022 cw(c135.159,43.022) D11.1@134.508,43.673 ; 134.239,43.022 cw(c135.159,43.022) D11.1@134.508,43.673 ; 134.239,43.022 cw(c135.159,43.022) D11.1@134.508,43.673 ; 134.239,43.022 cw(c135.159,43.022) D11.1@134.508,43.673 ; 134.239,44.862 ccw(c135.159,44.862) D11.1@134.508,44.211 ; 134.239,44.862 ccw(c135.159,44.862) D11.1@134.508,44.211 ; 134.239,44.862 ccw(c135.159,44.862) D11.1@134.508,44.211 ; 134.239,44.862 ccw(c135.159,44.862) D11.1@134.508,44.211 ; 134.239,44.862 ccw(c135.159,44.862) D11.1@134.508,44.211 ; 134.239,44.949 cw(c135.772,44.949) D12.1@134.688,46.033 ; 134.239,44.949 cw(c135.772,44.949) D12.1@134.688,46.033 ; 134.239,44.949 cw(c135.772,44.949) D12.1@134.688,46.033 ; 134.239,44.949 cw(c135.772,44.949) D12.1@134.688,46.033 ; 134.239,44.949 cw(c135.772,44.949) D12.1@134.688,46.033 ; 134.239,45.475 ccw(c135.772,45.475) D11.1@134.688,44.391 ; 134.239,45.475 ccw(c135.772,45.475) D11.1@134.688,44.391 ; 134.239,45.475 ccw(c135.772,45.475) D11.1@134.688,44.391 ; 134.239,45.475 ccw(c135.772,45.475) D11.1@134.688,44.391 ; 134.239,45.475 ccw(c135.772,45.475) D11.1@134.688,44.391 ; 134.239,45.562 cw(c135.159,45.562) D12.1@134.508,46.213 ; 134.239,45.562 cw(c135.159,45.562) D12.1@134.508,46.213 ; 134.239,45.562 cw(c135.159,45.562) D12.1@134.508,46.213 ; 134.239,45.562 cw(c135.159,45.562) D12.1@134.508,46.213 ; 134.239,45.562 cw(c135.159,45.562) D12.1@134.508,46.213 ; 134.239,47.402 ccw(c135.159,47.402) D12.1@134.508,46.751 ; 134.239,47.402 ccw(c135.159,47.402) D12.1@134.508,46.751 ; 134.239,47.402 ccw(c135.159,47.402) D12.1@134.508,46.751 ; 134.239,47.402 ccw(c135.159,47.402) D12.1@134.508,46.751 ; 134.239,47.489 cw(c135.772,47.489) D13.1@134.688,48.573 ; 134.239,47.489 cw(c135.772,47.489) D13.1@134.688,48.573 ; 134.239,47.489 cw(c135.772,47.489) D13.1@134.688,48.573 ; 134.239,47.489 cw(c135.772,47.489) D13.1@134.688,48.573 ; 134.239,48.015 ccw(c135.772,48.015) D12.1@134.688,46.931 ; 134.239,48.015 ccw(c135.772,48.015) D12.1@134.688,46.931 ; 134.239,48.015 ccw(c135.772,48.015) D12.1@134.688,46.931 ; 134.239,48.015 ccw(c135.772,48.015) D12.1@134.688,46.931 ; 134.239,48.102 cw(c135.159,48.102) D13.1@134.508,48.753 ; 134.239,48.102 cw(c135.159,48.102) D13.1@134.508,48.753 ; 134.239,48.102 cw(c135.159,48.102) D13.1@134.508,48.753 ; 134.239,48.102 cw(c135.159,48.102) D13.1@134.508,48.753 ; 134.239,49.942 ccw(c135.159,49.942) D13.1@134.508,49.291 ; 134.239,49.942 ccw(c135.159,49.942) D13.1@134.508,49.291 ; 134.239,49.942 ccw(c135.159,49.942) D13.1@134.508,49.291 ; 134.239,50.029 cw(c135.772,50.029) D14.1@134.688,51.113 ; 134.239,50.029 cw(c135.772,50.029) D14.1@134.688,51.113 ; 134.239,50.029 cw(c135.772,50.029) D14.1@134.688,51.113 ; 134.239,50.555 ccw(c135.772,50.555) D13.1@134.688,49.471 ; 134.239,50.555 ccw(c135.772,50.555) D13.1@134.688,49.471 ; 134.239,50.555 ccw(c135.772,50.555) D13.1@134.688,49.471 ; 134.239,50.642 cw(c135.159,50.642) D14.1@134.508,51.293 ; 134.239,50.642 cw(c135.159,50.642) D14.1@134.508,51.293 ; 134.239,50.642 cw(c135.159,50.642) D14.1@134.508,51.293 ; 134.239,52.482 ccw(c135.159,52.482) 134.508,51.831 cw(c135.159,52.482) 134.239,52.482 ; 134.239,52.482 cw(c133.319,52.482) 133.97,51.831 ccw(c133.319,52.482) 134.239,52.482 ; 134.239,52.569 ccw(c132.706,52.569) 133.79,53.653 cw(c132.706,52.569) 134.239,52.569 ; 134.239,52.569 cw(c135.772,52.569) 134.688,53.653 ccw(c135.772,52.569) 134.239,52.569 ; 134.239,53.095 ccw(c135.772,53.095) 134.688,52.011 cw(c135.772,53.095) 134.239,53.095 ; 134.239,53.095 cw(c132.706,53.095) 133.79,52.011 ccw(c132.706,53.095) 134.239,53.095 ; 134.239,53.182 ccw(c133.319,53.182) 133.97,53.833 cw(c133.319,53.182) 134.239,53.182 ; 134.239,53.182 cw(c135.159,53.182) 134.508,53.833 ccw(c135.159,53.182) 134.239,53.182 ; 154.178,44.577 R50.2@154.178,45.72 157.607,45.72 ; 154.432,69.469 v1(154.94,69.977)
  Bottom Layer w0.254: C5.1@53.844,63.062 cw(c53.578,62.611) 54.102,62.611 ; C5.1@54.102,63.5 54.102,62.611 ; C5.1@54.36,63.062 ccw(c54.626,62.611) 54.102,62.611 ; led.1@61.781,104.707 ccw(c60.697,103.623) 60.697,105.156 ccw(c60.697,106.689) led.1@61.781,105.605 ; led.1@61.961,104.887 ccw(c61.31,104.236) 61.31,105.156 ccw(c61.31,106.076) led.1@61.961,105.425 ; led.1@62.23,105.156 60.579,105.156 58.293,102.87 58.293,95.123 61.468,91.948 61.468,84.836 61.976,84.328 powerkey.2@63.754,84.328 ; powerkey.2@63.287,83.861 ccw(c62.16,82.734) 62.16,84.328 ccw(c62.16,85.922) powerkey.2@63.287,84.795 ; powerkey.2@63.467,84.041 ccw(c62.773,83.347) 62.773,84.328 ccw(c62.773,85.309) powerkey.2@63.467,84.615 ; C6.2@66.294,63.5 cw(c65.068,63.5) 65.935,62.633 cw(c66.802,61.766) C6.2@66.802,62.992 ; C6.2@66.548,63.5 cw(c67.468,63.5) 66.817,64.15 ; C6.2@67.056,63.5 cw(c69.202,63.5) 67.685,65.018 ; 67.251,64.584 ccw(c68.335,63.5) C6.2@66.802,63.5 ; C6.2@67.31,63.5 cw(c70.069,63.5) 68.118,65.451 ; v1@76.095,65.808 ccw(c75.228,64.941) 75.228,66.167 ccw(c75.228,67.393) v1@76.095,66.526 ; v1(76.454,66.167) 68.834,66.167 66.802,64.135 C6.2@66.802,63.5 ; AT89S52.31@108.962,66.293 110.49,67.821 ; AT89S52.40@108.966,88.9 109.474,88.9 110.49,87.884 110.49,67.821 ; AT89S52.40@109.085,88.5 cw(c109.389,87.48) 110.141,88.233 ; AT89S52.31@109.112,66.814 ccw(c109.112,67.711) 109.746,67.077 ; AT89S52.31@109.112,67.068 ccw(c109.112,68.578) 110.18,67.511 ; AT89S52.40@109.158,88.257 cw(c109.527,87.016) 110.443,87.931 ; AT89S52.31@109.633,66.306 cw(c111.13,66.344) 110.071,67.402 ; AT89S52.31@109.887,66.313 cw(c111.946,66.364) 110.49,67.821 ; AT89S52.40@109.891,88.9 ccw(c110.899,88.9) 110.187,88.187 ; v1(115.697,88.9) 117.856,88.9 118.618,89.662 tp3.3@118.618,92.456 ; v1@116.056,88.541 cw(c116.923,87.674) 116.923,88.9 cw(c116.923,90.126) v1@116.056,89.259 ; tp3.3@118.177,92.015 cw(c117.114,90.952) 118.618,90.952 cw(c120.122,90.952) tp3.3@119.059,92.015 ; tp3.3@118.357,92.195 cw(c117.727,91.565) 118.618,91.565 cw(c119.509,91.565) tp3.3@118.879,92.195 ; JP-0.9@121.158,66.548 125.603,66.548 127.635,64.516 v1(127.635,62.103) ; JP-0.9@121.419,66.287 cw(c122.049,65.657) 122.049,66.548 cw(c122.049,67.439) JP-0.9@121.419,66.809 ; JP-0.9@121.599,66.107 cw(c122.662,65.044) 122.662,66.548 cw(c122.662,68.052) JP-0.9@121.599,66.989 ; 1602.2@125.289,115.249 ccw(c124.226,116.312) 125.73,116.312 ccw(c127.234,116.312) 1602.2@126.171,115.249 ; 12864.2@125.289,117.923 cw(c124.226,116.86) 125.73,116.86 cw(c127.234,116.86) 12864.2@126.171,117.923 ; 1602.2@125.469,115.069 ccw(c124.839,115.699) 125.73,115.699 ccw(c126.621,115.699) 1602.2@125.991,115.069 ; 12864.2@125.469,118.103 cw(c124.839,117.473) 125.73,117.473 cw(c126.621,117.473) 12864.2@125.991,118.103 ; 1602.2@125.73,114.808 12864.2@125.73,118.364 ; v1@127.276,62.462 ccw(c126.409,63.329) 127.635,63.329 ccw(c128.861,63.329) v1@127.994,62.462 ; DA0832.20@132.335,108.2 DA0832.19@134.875,108.2 DA0832.19@134.875,108.713 ; DA0832.20@132.687,107.848 cw(c133.537,106.998) 133.537,108.2 cw(c133.537,109.402) DA0832.20@132.687,108.552 ; v1@133.245,115.084 cw(c132.378,114.217) 133.604,114.217 cw(c134.83,114.217) v1@133.963,115.084 ; 133.604,108.2 v1(133.604,115.443) ; 133.604,109.601 140.843,109.601 141.224,109.22 141.224,107.696 142.875,106.045 150.622,106.045 151.257,106.68 151.257,109.22 153.67,111.633 v1(157.861,111.633) ; DA0832.19@134.523,107.848 ccw(c133.673,106.998) 133.673,108.2 ccw(c133.673,109.402) DA0832.19@134.523,108.552 ; 18b20.1@146.625,38.675 cw(c145.562,37.612) 147.066,37.612 cw(c148.57,37.612) 18b20.1@147.507,38.675 ; 18b20.1@146.805,38.855 cw(c146.175,38.225) 147.066,38.225 cw(c147.957,38.225) 18b20.1@147.327,38.855 ; 18b20.1@147.066,39.116 147.066,36.195 148.717,34.544 152.146,34.544 154.178,32.512 ; DS1302.1@149.094,62.483 150.75,62.483 153.035,60.198 153.035,46.863 R50.2@154.178,45.72 ; DS1302.1@149.613,62.142 cw(c150.437,61.318) 150.437,62.483 cw(c150.437,63.648) DS1302.1@149.613,62.824 ; 2003.9@150.115,98.04 150.373,98.298 156.464,98.298 156.972,98.806 156.972,106.045 157.607,106.68 161.163,106.68 163.068,104.775 163.068,99.949 166.878,96.139 166.878,70.231 166.537,69.89 ; 2003.9@150.288,98.03 cw(c150.934,97.383) 150.934,98.298 ; 2003.9@150.467,97.85 cw(c151.548,96.77) 151.548,98.298 ; 2003.9@150.467,98.555 ccw(c151.087,99.175) 151.087,98.298 ; R50.2@153.543,45.72 ccw(c152.01,45.72) 153.094,46.804 ccw(c154.178,47.888) R50.2@154.178,46.355 ; R50.2@153.797,45.72 ccw(c152.877,45.72) 153.528,46.37 ccw(c154.178,47.021) R50.2@154.178,46.101 ; D21.1@154.788,32.207 ccw(c154.178,31.75) 154.178,32.512 ; D21.1@154.788,32.817 cw(c154.178,33.274) 154.178,32.512 ; D21.1@154.835,32.153 cw(c153.968,31.286) 155.194,31.286 cw(c156.42,31.286) D21.1@155.553,32.153 ; v1(154.94,69.977) 164.329,69.977 motor.2@164.416,69.89 166.537,69.89 ; v1@155.299,69.618 cw(c156.166,68.751) 156.166,69.977 cw(c156.166,71.203) v1@155.299,70.336 ; v1@157.502,111.274 ccw(c156.635,110.407) 156.635,111.633 ccw(c156.635,112.859) v1@157.502,111.992 ; Ref.1@158.79,106.276 ccw(c157.815,105.3) 157.815,106.68 ccw(c157.815,108.06) Ref.1@158.79,107.084 ; Ref.1@158.97,106.455 ccw(c158.428,105.913) 158.428,106.68 ccw(c158.428,107.447) Ref.1@158.97,106.905 ; 红外接头.1@159.325,34.611 cw(c158.262,33.548) 159.766,33.548 cw(c161.27,33.548) 红外接头.1@160.207,34.611 ; 红外接头.1@159.505,34.791 cw(c158.875,34.161) 159.766,34.161 cw(c160.657,34.161) 红外接头.1@160.027,34.791 ; Ref.1@159.546,106.455 cw(c160.088,105.913) 160.088,106.68 cw(c160.088,107.447) Ref.1@159.546,106.905 ; Ref.1@159.726,106.276 cw(c160.701,105.3) 160.701,106.68 cw(c160.701,108.06) Ref.1@159.726,107.084 ; 红外接头.1@159.766,35.052 159.766,30.861 159.258,30.353 155.956,30.353 155.194,31.115 D21.1@155.194,32.512 154.178,32.512 ; 161.828,69.977 cw(c161.828,67.302) motor.2@163.719,69.194 ; 162.248,69.977 ccw(c162.248,72.058) motor.2@163.719,70.587 ; 162.441,69.977 cw(c162.441,67.915) motor.2@163.899,69.373 ; 162.861,69.977 ccw(c162.861,71.445) motor.2@163.899,70.407 ; 163.054,69.977 cw(c163.054,68.528) motor.2@164.079,69.553 ; motor.2@164.974,69.418 cw(c165.99,68.561) 165.99,69.89 cw(c165.99,71.219) motor.2@164.975,70.362 ; motor.2@165.169,69.254 cw(c166.537,68.099) 166.537,69.89 ; motor.2@165.169,70.525 ccw(c166.537,71.68) 166.537,69.89 ; 54.102,62.611 54.737,61.976 65.278,61.976 C6.2@66.802,63.5
pads on no net: 2003.1 2003.2 2003.3 2003.14 2003.15 2003.16 12864.3 12864.16 12864.18 dj.1 dj.3 DS1302.8 ISP.3 J61.1 J61.4 J61.6 J61.7 J61.8 J61.9 J61.10 J61.11 JP-0.2 JP-0.3 JP-0.5 JP-0.7 JP-0.8 MAX232.11 MAX232.12 MAX232.13 MAX232.14 P0.2 P0.3 P0.5 P0.7 P0.8 P1.6 P1.7 P1.8 powerkey.3 powerkey.4 RST. S0. S1. S01. S2. S02. S3. S03. S04. S4. S5. S6. S7. S8. S9. S10. S11. S12. S13. S14. S15. USB. USB.2 USB.3

## Polygon pours and split planes (outlines as drawn)
no net on Top Layer (hatched 45Degree grid 0.508 track 0.203): 37.338,120.904 37.338,28.575 38.227,27.686 38.354,27.559 167.64,27.559 168.783,28.702 168.783,120.777 167.894,121.666 167.767,121.793 38.227,121.793
no net on Bottom Layer (hatched 45Degree grid 0.508 track 0.203): 37.338,117.475 37.338,28.321 38.227,27.432 167.767,27.432 168.783,28.448 168.783,120.904 167.894,121.793 38.227,121.793 37.338,120.904

## Silkscreen, mask and mechanical layers (free items; w line width, h text height)
Top Overlay:
  lines w0.254: 59.563,82.931 59.563,83.693 61.976,83.693 62.103,83.566 62.103,82.931 ; 60.071,83.693 60.071,84.582 61.595,84.582 61.595,83.693 60.071,83.693
  text "1" at 130.556,117.729 h1.52
  text "20" at 74.676,117.602 h1.52
  text "VCC" at 43.561,115.951 h1.52 r90
  text "GND" at 58.293,115.951 h1.52 r90
  text "16" at 85.979,114.173 h1.52
  text "1" at 130.683,113.919 h1.52
  text "JP-5" at 140.462,113.538 h1.52
  text "OUT1" at 163.703,108.712 h1.02
  text "OUT2" at 168.021,102.235 h1.02 r90
  text "RFB" at 163.957,98.679 h1.02
  text "JP-1" at 120.142,94.488 h1.52
  text "JP-10" at 159.512,85.217 h1.52 r90
  text "JP-2" at 135.128,82.296 h1.52
  text "JP-9" at 159.766,75.311 h1.52 r90
  text "JP-8" at 161.163,65.024 h1.52 r90
  text "JP-6" at 47.879,57.023 h1.52
  text "8" at 55.245,57.023 h1.52
  text "1" at 76.708,57.023 h1.52
  text "JP-7" at 161.163,50.8 h1.52
  text "JP-4" at 147.066,42.291 h1.52
Mechanical 1:
  lines w0.254: 169.291,119.761 169.291,121.158 ; 169.291,121.158 169.291,29.337 169.291,28.321 168.021,27.051 37.846,27.051 36.83,28.067 36.83,29.464 36.83,121.158 37.973,122.301 167.767,122.301 168.148,122.301 169.291,121.158

## Text inside footprints (layer, text, board x,y; h text height)
8050: Top Overlay "3" at 155.196,90.534 h1.5 r270; Top Overlay "1" at 152.527,90.932 h1.5 r270
ISP: Top Overlay "2" at 42.418,42.672 h1.27 r90; Top Overlay "1" at 44.958,43.18 h1.27 r90; Top Overlay "9" at 44.958,56.896 h1.27 r90; Top Overlay "10" at 42.418,56.896 h1.27 r90
J61: Top Overlay "1" at 51.713,71.426 h1.5 r90; Top Overlay "5" at 51.713,82.256 h1.5 r90; Top Overlay "9" at 42.313,80.871 h1.5 r90; Top Overlay "6" at 42.313,72.561 h1.5 r90
Q71: Top Overlay "3" at 143.51,48.514 h1.5; Top Overlay "1" at 143.891,45.339 h1.5